# Altium PCB PCB4.PcbDoc
Units mm, origin at the board's own origin, x right, y up, seen from the top; angles counter-clockwise.
Board outline 120 x 55 mm, 4 copper layers (Top Layer, Layer 1, Layer 2, Bottom Layer), stack 0.603 mm thick; 49 components, 37 nets, 214 pads, 45 vias.
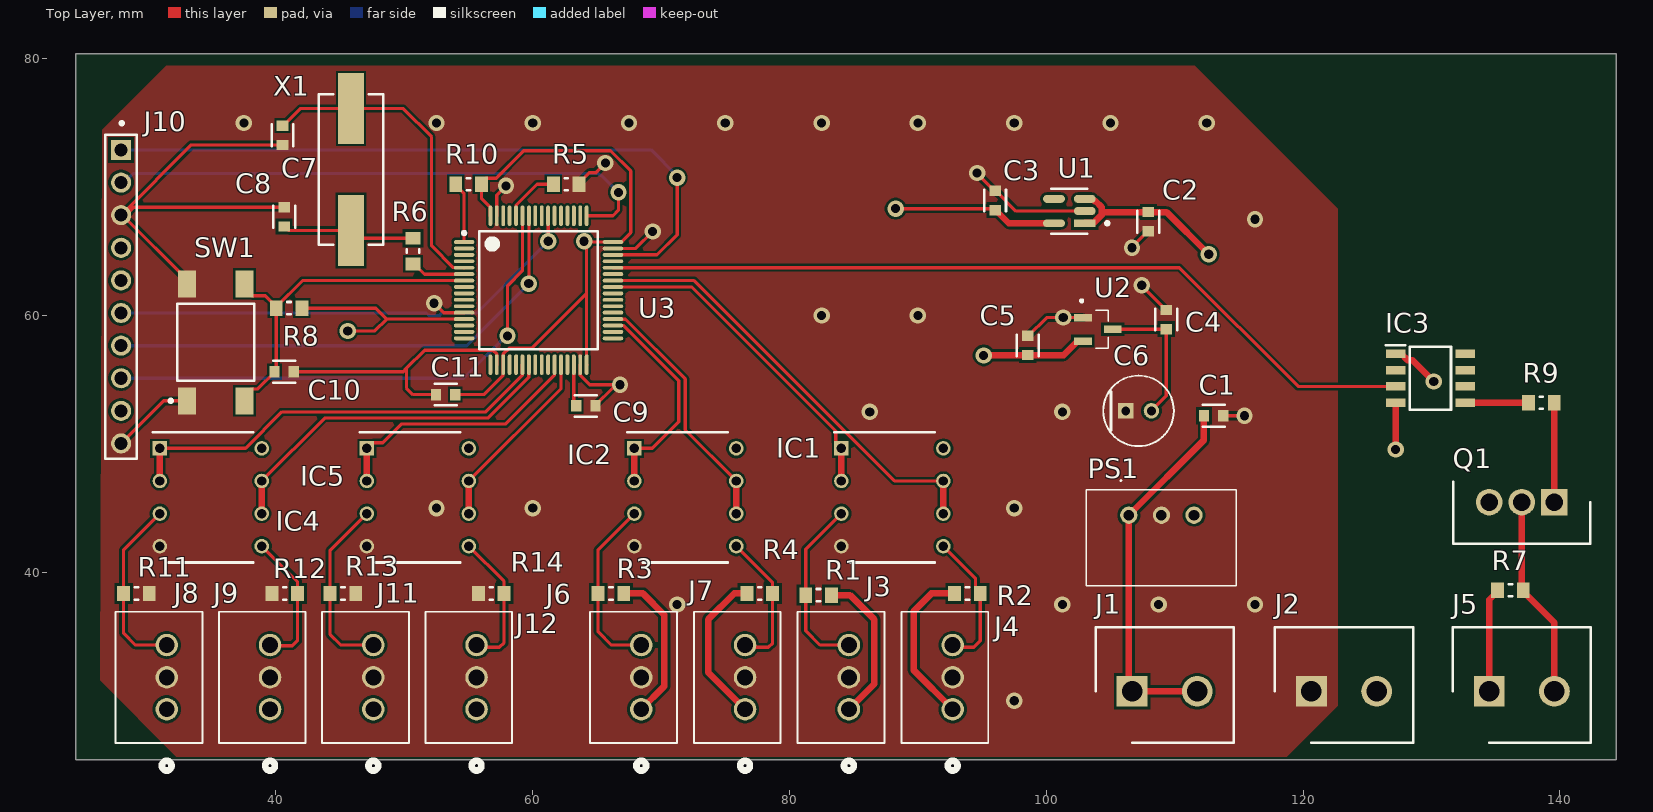
[diagram p0: Top Layer view]
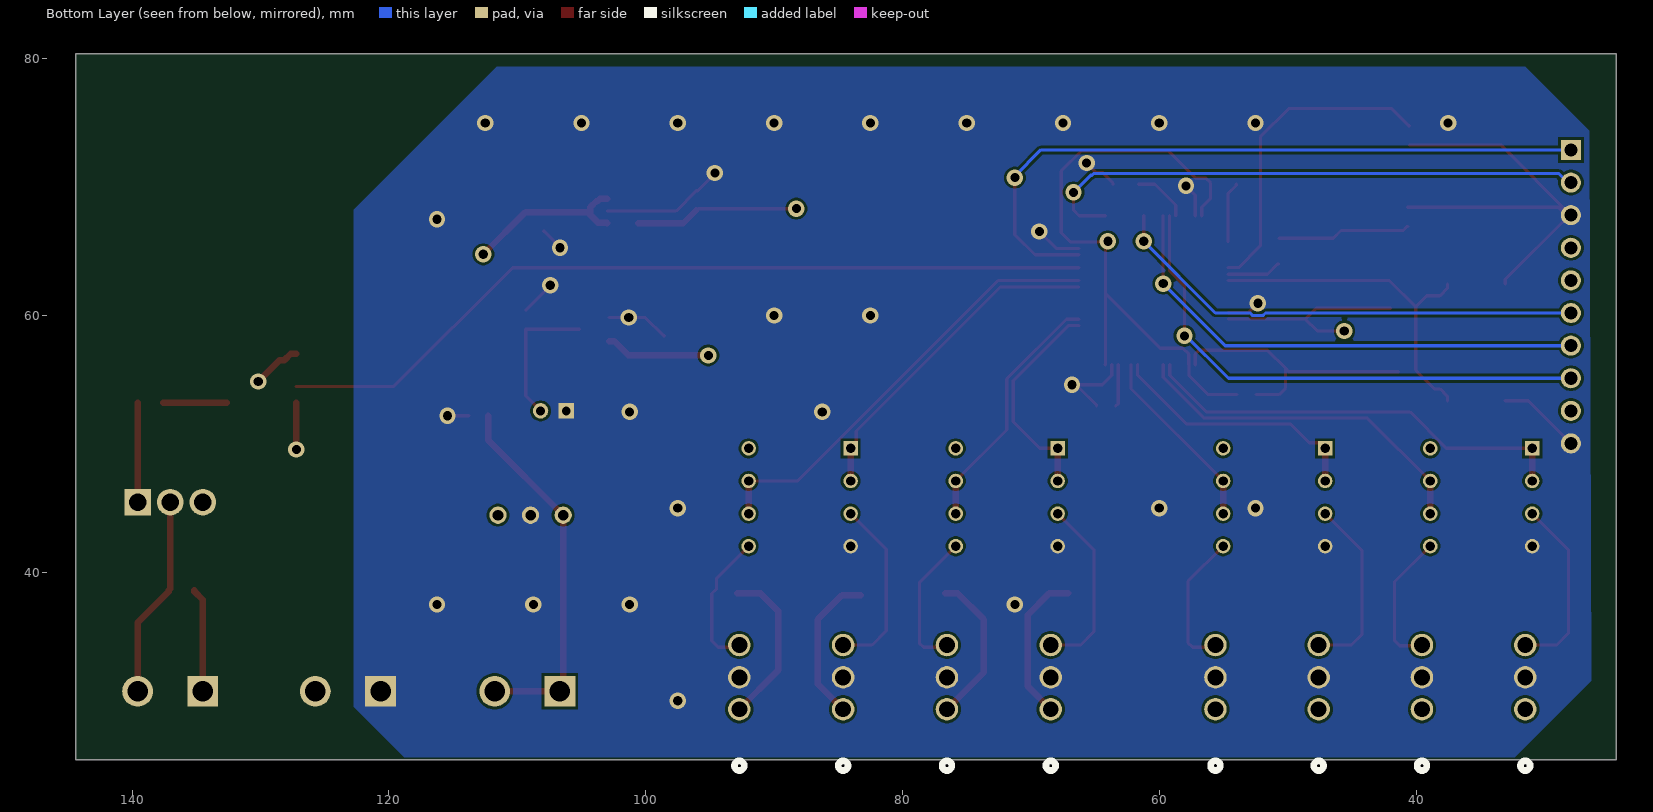
[diagram p1: Bottom Layer view, seen from below]
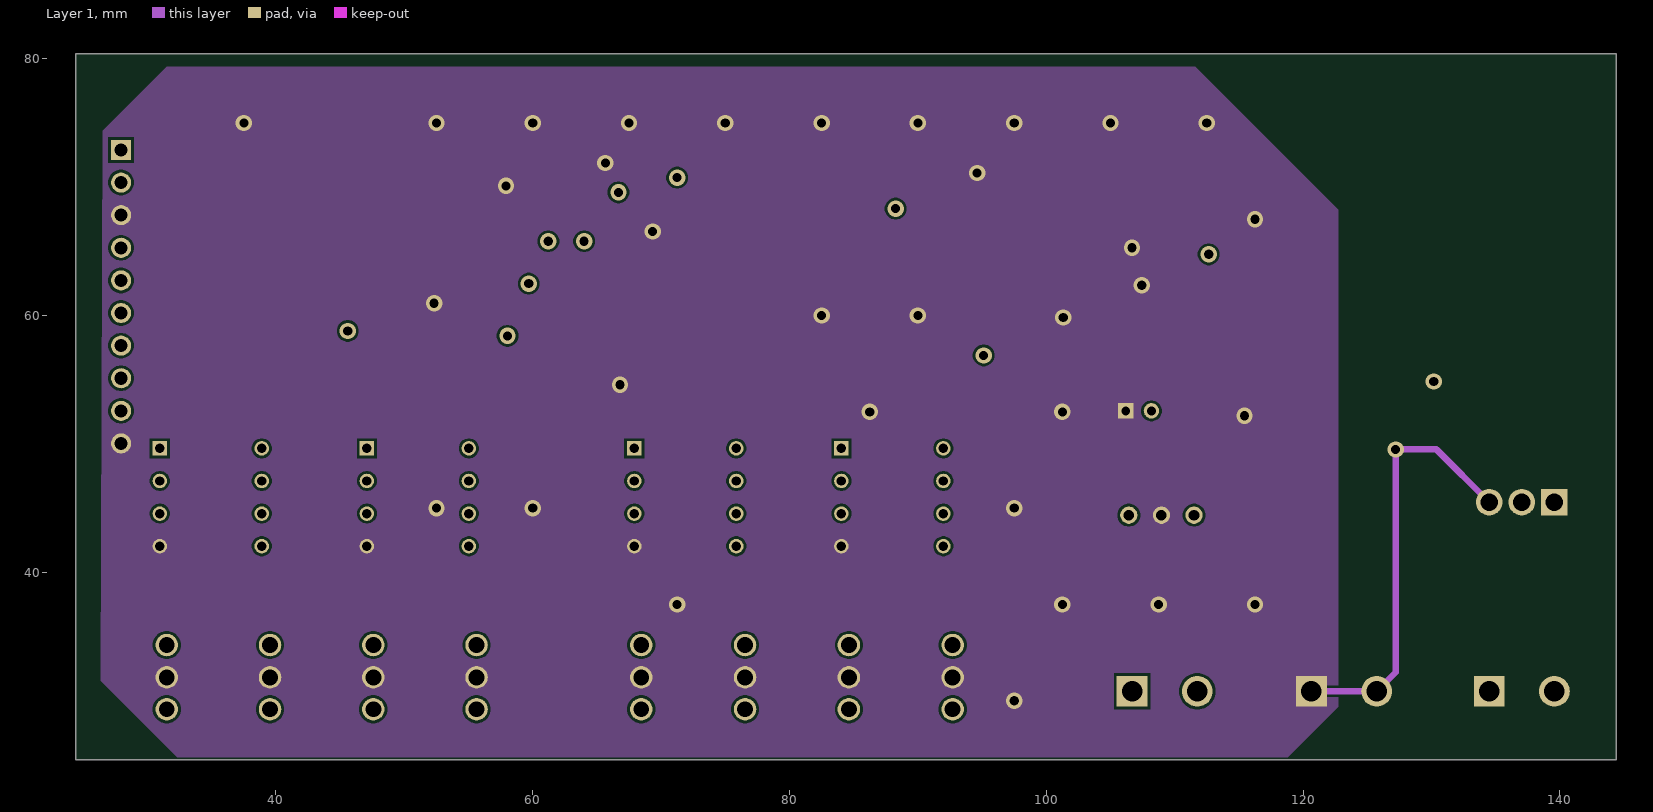
[diagram p2: Layer 1]
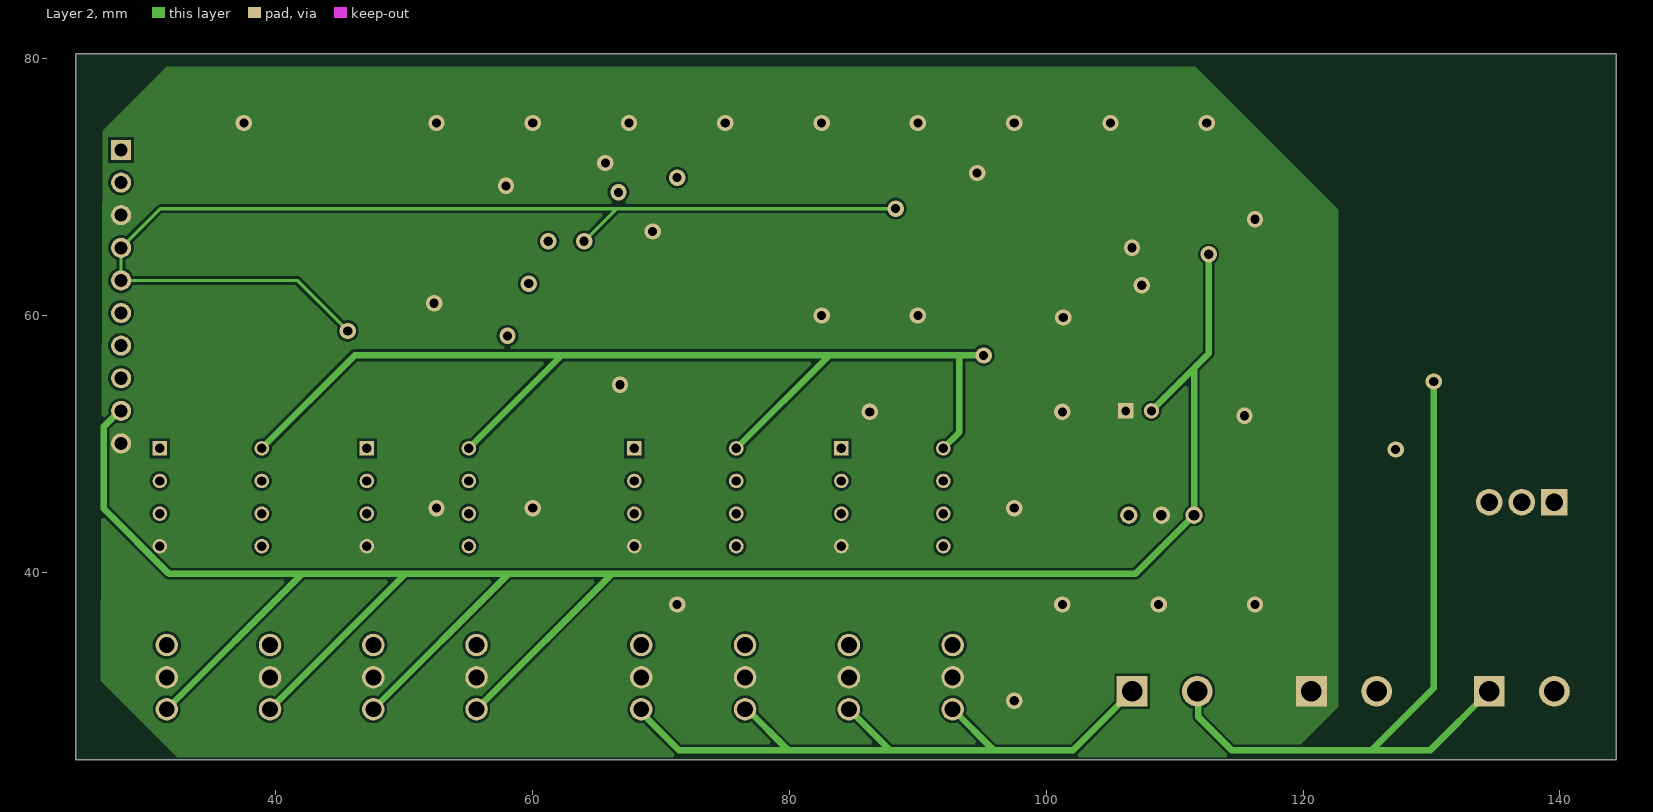
[diagram p3: Layer 2]
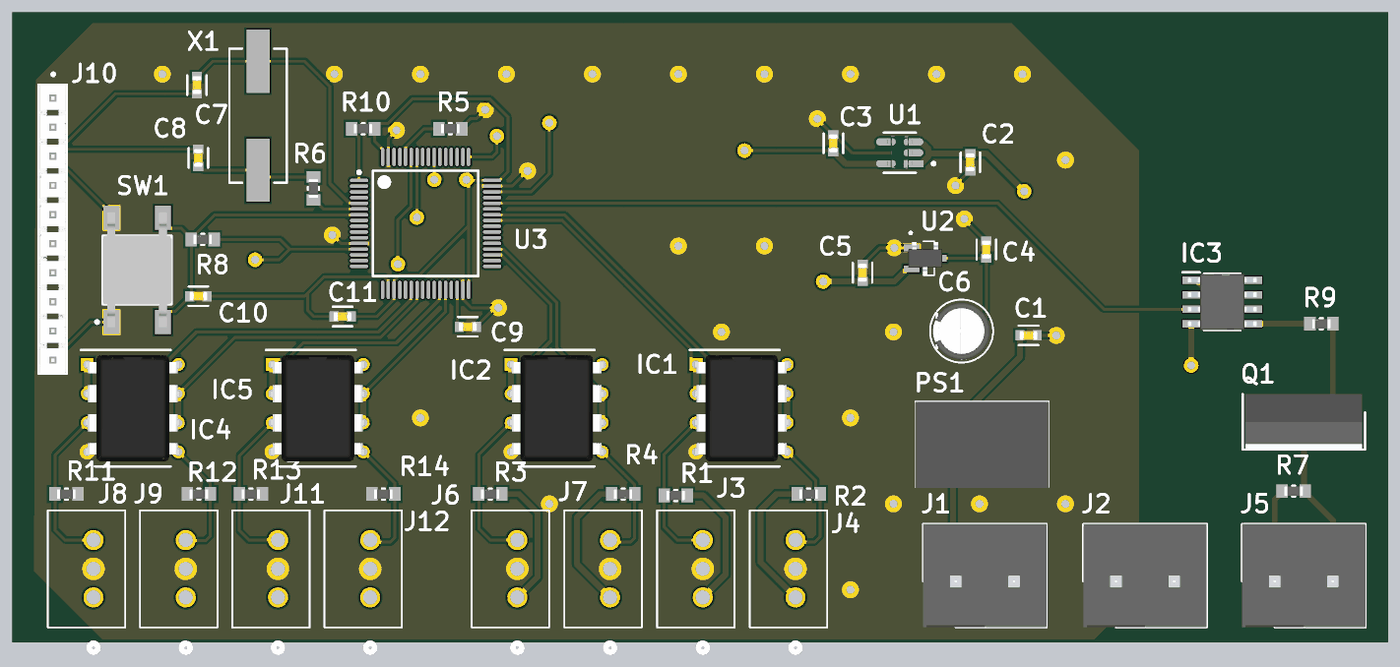
[diagram p4: 3D render of the assembled board from above, using the file's embedded part models]

## Layer stack, top to bottom
Top Solder: solder mask 0.0102, Solder Resist, Dk 3.5
Top Layer: signal copper 0.0356
Dielectric 2: prepreg 0.0711, PP-006, Dk 4.1
Layer 1: signal copper 0.035
Dielectric 1: dielectric 0.32, FR-4, Dk 4.8
Layer 2: signal copper 0.035
Dielectric 3: prepreg 0.0711, PP-006, Dk 4.1
Bottom Layer: signal copper 0.0356
Bottom Solder: solder mask 0.0102, Solder Resist, Dk 3.5

## Board outline
24.4,25.4 144.4,25.4 144.4,80.4 24.4,80.4

## Design rules (kind name [scope] priority, off if disabled: settings)
Clearance [All] p1: gap=0.2 ignorepadtopadclearanceinfootprint=FALSE
PolygonConnect [All] p1: connectstyle=Direct reliefconductorwidth=0.254 reliefentries=4 polygonreliefangle="90 Angle" airgapwidth=0.254
RoutingVias [All] p1: holewidth=0.711 width=1.27 viastyle="Through Hole" minholewidth=0.711 minwidth=1.27 maxholewidth=0.711 maxwidth=1.27
SolderMaskExpansion [All] p1: expansion=0.102 istentingtop=FALSE
SupplyNets "Schematic Supply Nets_1" [InNet('GND')] p1: voltage=0.000
SupplyNets "Schematic Supply Nets" [InNet('VCC')] p2: voltage=0.000
Width [All] p1: maxlimit=0.508 minlimit=0.254 preferedwidth=0.254
30 further rules are at their usual default settings.

## Components (designator, comment, footprint, x,y, rotation, side; value= is the part's Value field where it differs from the comment)
C1 "CC0603KRX7R9BB103" FP-CC0603-DA-MFG 113.03,52.197 r180 top value="3.3 uF"
C2 "CC0603KRX7R9BB103" FP-CC0603-DA-MFG 107.95,67.31 r90 top value="1 uF"
C3 "CC0603KRX7R9BB103" FP-CC0603-DA-MFG 96.012,68.961 r270 top value="1 uF"
C4 "CC0603KRX7R9BB103" FP-CC0603-DA-MFG 109.347,59.69 r270 top value="1 uF"
C5 "CC0603KRX7R9BB103" FP-CC0603-DA-MFG 98.552,57.67 r270 top value="1 uF"
C6 "100uF" FP-RAD-TH-D_5_0_5-L_11_1-MFG 107.188,52.578 r0 top
C7 "CC0603KRX7R9BB103" FP-CC0603-DA-MFG 40.513,74.041 r270 top value="20 pF"
C8 "CC0603KRX7R9BB103" FP-CC0603-DA-MFG 40.64,67.691 r90 top value="20 pF"
C9 "CC0603KRX7R9BB103" FP-CC0603-DA-MFG 64.135,52.959 r0 top value="2.2 uF"
C10 "CC0603KRX7R9BB104" FP-CC0603-DA-MFG 40.64,55.626 r0 top value="100 nF"
C11 "CC0603KRX7R9BB104" FP-CC0603-DA-MFG 53.213,53.848 r180 top value="100 nF"
IC1 "LM2904P" DIP794W53P254L959H508Q8N 88.011,45.847 r0 top
IC2 "LM2904P" DIP794W53P254L959H508Q8N 71.882,45.847 r0 top
IC3 "IR2101S" SOIC127P600X175-8N 129.921,55.118 r0 top
IC4 "LM2904P" DIP794W53P254L959H508Q8N 34.925,45.847 r0 top
IC5 "LM2904P" DIP794W53P254L959H508Q8N 51.054,45.847 r0 top
J1 "32.052" SHDR2W100P0X508_1X2_1076X900X1350P 106.68,30.734 r0 top
J2 "32.052" SHDR2W100P0X508_1X2_1076X900X1350P 120.65,30.734 r0 top
J3 "353120360" CONN_35312-0360_MOL 84.624,29.337 r90 top
J4 "353120360" CONN_35312-0360_MOL 92.71,29.337 r90 top
J5 "32.052" SHDR2W100P0X508_1X2_1076X900X1350P 134.493,30.734 r0 top
J6 "353120360" CONN_35312-0360_MOL 68.453,29.337 r90 top
J7 "353120360" CONN_35312-0360_MOL 76.539,29.337 r90 top
J8 "353120360" CONN_35312-0360_MOL 31.496,29.337 r90 top
J9 "353120360" CONN_35312-0360_MOL 39.539,29.337 r90 top
J10 "4-644456-0" FP-4-644456-0-MFG 27.94,61.468 r90 top
J11 "353120360" CONN_35312-0360_MOL 47.583,29.337 r90 top
J12 "353120360" CONN_35312-0360_MOL 55.626,29.337 r90 top
PS1 "SRH05S05" SRH05S05 108.966,43.075 r0 top
Q1 "IRFZ44n" TO254P483X1016X2223-3P 139.573,45.466 r180 top
R1 "CR0603-FX-1002EAS" FP-CR0603-AS-MFG 82.26,38.227 r0 top
R2 "CR0603-FX-1002EAS" FP-CR0603-AS-MFG 93.855,38.354 r180 top
R3 "CR0603-FX-1002EAS" FP-CR0603-AS-MFG 66.089,38.354 r0 top
R4 "CR0603-FX-1002EAS" FP-CR0603-AS-MFG 77.683,38.354 r180 top
R5 "CR0603-FX-1002EAS" FP-CR0603-AS-MFG 62.611,70.231 r180 top
R6 "CR0603-FX-1002EAS" FP-CR0603-AS-MFG 50.673,65.024 r270 top
R7 "CR0603-FX-1002EAS" FP-CR0603-AS-MFG 136.144,38.608 r180 top
R8 "CR0603-FX-1002EAS" FP-CR0603-AS-MFG 41.021,60.579 r0 top
R9 "CR0603-FX-1002EAS" FP-CR0603-AS-MFG 138.557,53.213 r0 top
R10 "CR0603-FX-1002EAS" FP-CR0603-AS-MFG 55.007,70.231 r0 top
R11 "CR0603-FX-1002EAS" FP-CR0603-AS-MFG 29.132,38.354 r180 top
R12 "CR0603-FX-1002EAS" FP-CR0603-AS-MFG 40.684,38.354 r0 top
R13 "CR0603-FX-1002EAS" FP-CR0603-AS-MFG 45.219,38.354 r180 top
R14 "CR0603-FX-1002EAS" FP-CR0603-AS-MFG 56.771,38.354 r0 top
SW1 "FSM4JSMATR" TECO-FSM4JSMATR_V 35.306,57.912 r180 top
U1 "AP2112K-3.3TRG1" FP-SOT25-IPC_A 101.796,68.138 r180 top
U2 "AP2125N-4.2TRG1" SOT95P282X145-3N 104.013,58.928 r270 top
U3 "STM32F411RET6" STM-LQFP64_L 60.452,61.976 r0 top
X1 "FOXSDLF/160-20" FOX-FOXSDLF160-20_V 45.847,71.374 r90 top

## Footprints (in the part's own frame and the unit in brackets; to place one, negate y for a bottom-side part, rotate by r counter-clockwise, add the part's x,y. Pads: shape width x height; smd on the part's side, far side on the other; paste and mask are expansions set on the pad)
CONN_35312-0360_MOL [mil]
  round 69 hole 49: 1(0,0) 2(98,0) 3(197,0)
  silkscreen extent -188,-109 299,157
DIP794W53P254L959H508Q8N [mm]
  rect 1.13x1.13 hole 0.73: 1(-3.97,3.81)
  round 1.13 hole 0.73: 2(-3.97,1.27) 3(-3.97,-1.27) 4(-3.97,-3.81) 5(3.97,-3.81) 6(3.97,-1.27) 7(3.97,1.27) 8(3.97,3.81)
  silkscreen extent -4.53,-5.08 3.3,5.08, body extent -4.1,-4.64 4.1,4.64, height 4.21
FOX-FOXSDLF160-20_V [mm] "SMD, 2-Leads, Body 5x11.7mm, Height 4.5mm"
  rect 5.5x2 smd: 1(-4.75,0) 2(4.75,0)
  silkscreen extent -5.85,-2.5 5.85,2.5, body extent -5.85,-2.5 5.85,2.5, height 4.5
FP-4-644456-0-MFG [mil]
  rect 61.65x61.65 hole 40 paste-99999 mask+0: 1(450,0)
  round 61.65 hole 40 paste-99999 mask+0: 2(350,0) 3(250,0) 4(150,0) 5(50,0) 6(-50,0) 7(-150,0) 8(-250,0) 9(-350,0) 10(-450,0)
  silkscreen extent -497,-49 537,49, body extent -500,-52 500,52, height 10
FP-CC0603-DA-MFG [mm]
  rect 0.8x0.9 smd paste+0 mask+0: 1(-0.75,0) 2(0.75,0)
  silkscreen extent -0.85,-0.85 0.85,0.85, body extent -1.35,-0.75 1.35,0.75, height 0.25
FP-CR0603-AS-MFG [mm]
  rect 1x1.2 smd paste+0 mask+0: 1(-1,0) 2(1,0)
  silkscreen extent -0.13,-0.48 0.13,0.48, body extent -1.6,-0.7 1.6,0.7, height 0.25
FP-RAD-TH-D_5_0_5-L_11_1-MFG [mm]
  rect 1.2x1.2 hole 0.7 paste-2539.97 mask+0: 1(-1,0)
  round 1.2 hole 0.7 paste-2539.97 mask+0: 2(1,0)
  silkscreen extent -2.75,-2.75 2.75,2.75, body extent -2.85,-2.85 2.85,2.85, height 0.25
FP-SOT25-IPC_A [mm]
  rect 1.707x0.616 smd paste+0 mask+0: 1(-1.201,0.95)
  rrect100% 1.707x0.616 smd paste+0 mask+0: 2(-1.201,0) 3(-1.201,-0.95) 4(1.201,-0.95) 5(1.201,0.95)
  silkscreen extent -3.08,-1.75 1.4,1.75, body extent -2.55,-2 2.55,2, height 0.25
SHDR2W100P0X508_1X2_1076X900X1350P [mm]
  rect 2.4x2.4 hole 1.6: 1(0,0)
  round 2.4 hole 1.6: 2(5.08,0)
  silkscreen extent -2.84,-4 7.92,5, body extent -2.84,-4 7.92,5, height 13.5
SOIC127P600X175-8N [mm]
  rect 1.525x0.65 smd: 1(-2.712,1.905) 2(-2.712,0.635) 3(-2.712,-0.635) 4(-2.712,-1.905) 5(2.712,-1.905) 6(2.712,-0.635) 7(2.712,0.635) 8(2.712,1.905)
  silkscreen extent -3.47,-2.45 1.6,2.58, body extent -3,-2.45 3,2.45, height 1.75
SOT95P282X145-3N [mm]
  rect 0.59x1.39 smd: 1(-0.915,-1.165) 2(0.915,-1.165) 3(0,1.165)
  silkscreen extent -2.31,-1.36 1.48,0.8, body extent -1.41,-1.48 1.41,1.48, height 1.45
SRH05S05 [mm]
  round 1.349 hole 0.83: 1(-2.54,1.375) 2(0,1.375) 3(2.54,1.375)
  silkscreen extent -5.84,-4.13 5.84,4.12, body extent -5.84,-4.2 5.84,3.3, height 10.16
STM-LQFP64_L [mm] "QFP, 64-Leads, Body 10x10mm, Pitch 0.5mm, IPC High Density"
  oval 1.6x0.3 smd: 1(-5.8,3.75) 2(-5.8,3.25) 3(-5.8,2.75) 4(-5.8,2.25) 5(-5.8,1.75) 6(-5.8,1.25) 7(-5.8,0.75) 8(-5.8,0.25) 9(-5.8,-0.25) 10(-5.8,-0.75) 11(-5.8,-1.25) 12(-5.8,-1.75) 13(-5.8,-2.25) 14(-5.8,-2.75) 15(-5.8,-3.25) 16(-5.8,-3.75) 33(5.8,-3.75) 34(5.8,-3.25) 35(5.8,-2.75) 36(5.8,-2.25) 37(5.8,-1.75) 38(5.8,-1.25) 39(5.8,-0.75) 40(5.8,-0.25) 41(5.8,0.25) 42(5.8,0.75) 43(5.8,1.25) 44(5.8,1.75) 45(5.8,2.25) 46(5.8,2.75) 47(5.8,3.25) 48(5.8,3.75)
  oval 0.3x1.6 smd: 17(-3.75,-5.8) 18(-3.25,-5.8) 19(-2.75,-5.8) 20(-2.25,-5.8) 21(-1.75,-5.8) 22(-1.25,-5.8) 23(-0.75,-5.8) 24(-0.25,-5.8) 25(0.25,-5.8) 26(0.75,-5.8) 27(1.25,-5.8) 28(1.75,-5.8) 29(2.25,-5.8) 30(2.75,-5.8) 31(3.25,-5.8) 32(3.75,-5.8) 49(3.75,5.8) 50(3.25,5.8) 51(2.75,5.8) 52(2.25,5.8) 53(1.75,5.8) 54(1.25,5.8) 55(0.75,5.8) 56(0.25,5.8) 57(-0.25,5.8) 58(-0.75,5.8) 59(-1.25,5.8) 60(-1.75,5.8) 61(-2.25,5.8) 62(-2.75,5.8) 63(-3.25,5.8) 64(-3.75,5.8)
  silkscreen extent -5.92,-4.6 4.6,4.6, body extent -5,-5 5,5, height 1.6
TECO-FSM4JSMATR_V [mm] "SMD, 4-Leads, Body 6x6mm, Pitch 4.5mm"
  rect 1.4x2.1 smd: 1(2.25,4.55) 2(2.25,-4.55) 3(-2.25,4.55) 4(-2.25,-4.55)
  silkscreen extent -3,-3 3.62,4.67, body extent -3,-5 3,5, height 5.08
TO254P483X1016X2223-3P [mm]
  rect 2.07x2.07 hole 1.38: 1(0,0)
  round 2.07 hole 1.38: 2(2.54,0) 3(5.08,0)
  silkscreen extent -2.8,-1.61 7.88,3.22, body extent -2.54,-1.61 7.62,3.22, height 22.23

## Part data
C1 C2 C3 C4 C5 C7 C8 C9: library part CMP-2100-03600-2, "CAP CER 10000PF 50V X7R 0603", Capacitance="10 nF", Manufacturer=YAGEO, Package=CC0603-DA, Temperature="-55°C to +125°C", Temperature Characteristic=X7R, Temperature Coefficient=15%, Temperature Range High=+125°C, Temperature Range Low=-55°C, Tolerance=0.1, Voltage="50 V", Automotive=No, Category=Cap, ComponentLink2Description=Datasheet, ComponentLink2URL=http://www.yageo.com/documents/recent/UPY-GPHC_X7R_6.3V-to-50V_18.pdf, Device Class L1="Passive Components", Device Class L2=Capacitors, Device Class L3="Ceramic Capacitors", Digikey Description="CAP CER 10000PF 50V X7R 0603", Footprint Url=http://www.yageo.com/exep/pages/download/literatures/UPY-C_GEN_24.pdf, Height=0.9mm, Lead Free=Yes, Manufacturer Part Number=CC0603KRX7R9BB103, Material=Ceramic, Mouser Description="Multilayer Ceramic Capacitor, CC Series, 0.01 - F, - 10%, X7R, 50 V, 0603 [1608 Metric]", Octopart=https://octopart.com/cc0603krx7r9bb103-yageo-192938, RoHS=TRUE, Voltage Rating="50 V"
C6: library part CMP-05427-001055-1, "Aluminum Electrolytic Capacitors (Radial Lead Type) 33uF ±20% 35V"
C10 C11: library part CMP-2100-03601-2, "CAP CER 0.1UF 50V X7R 0603", Capacitance="100 nF", Manufacturer=YAGEO, Package=CC0603-DA, Temperature="-55°C to +125°C", Temperature Characteristic=X7R, Temperature Coefficient=15%, Temperature Range High=+125°C, Temperature Range Low=-55°C, Tolerance=0.1, Voltage="50 V", Automotive=No, Category=Cap, ComponentLink2Description=Datasheet, ComponentLink2URL=http://www.yageo.com/documents/recent/UPY-GPHC_X7R_6.3V-to-50V_18.pdf, Device Class L1="Passive Components", Device Class L2=Capacitors, Device Class L3="Ceramic Capacitors", Digikey Description="CAP CER 0.1UF 50V X7R 0603", Footprint Url=http://www.yageo.com/exep/pages/download/literatures/UPY-C_GEN_24.pdf, Height=0.9mm, Lead Free=Yes, Manufacturer Part Number=CC0603KRX7R9BB104, Material=Ceramic, Mouser Description="Multilayer Ceramic Capacitor, CC Series, 0.1 - F, - 10%, X7R, 50 V, 0603 [1608 Metric]", Octopart=https://octopart.com/cc0603krx7r9bb104-yageo-42244635, RoHS=TRUE, Voltage Rating="50 V"
IC1 IC2 IC4 IC5: "Integrated Circuit", Manufacturer_Name="Texas Instruments", Mouser Part Number=595-LM2904P, Arrow Part Number=LM2904P, Arrow Price/Stock=https://www.arrow.com/en/products/lm2904p/texas-instruments?utm_currency=USD&region=europe, Datasheet Link=http://www.ti.com/lit/ds/symlink/lm2904.pdf, Height=5.08mm, Manufacturer_Part_Number=LM2904P, Mouser Price/Stock=https://www.mouser.co.uk/ProductDetail/Texas-Instruments/LM2904P?qs=3pnr37ZAbK%252BRjjWgaCXbYA%3D%3D
IC3: "Integrated Circuit", Manufacturer_Name=Infineon, Datasheet Link=https://pdf1.alldatasheet.com/datasheet-pdf/view/102221/IRF/IR2101S.html, Height=1.75mm, Manufacturer_Part_Number=IR2101S
J1 J2 J5: "Connector", Manufacturer_Name=Altech, Mouser Part Number=845-32.052, Datasheet Link=https://www.mouser.com/datasheet/2/16/PCBUS-32235.pdf, Height=13.5mm, Manufacturer_Part_Number=32.052, Mouser Price/Stock=https://www.mouser.co.uk/ProductDetail/Altech/32.052?qs=3W%2FV3E1N0K7DFKJl2BNhnQ%3D%3D
J3 J4 J6 J7 J8 J9 J11 J12: Package=None, Availability=Unavailable, MP=353120360, Price=None
J10: library part CMP-03369-000038-1, "CONN HEADER VERT 10POS 2.54MM", Current Rating=5A, Manufacturer="TE Connectivity", Temperature="-55°C to +105°C", Temperature Range High=+105°C, Temperature Range Low=-55°C, Voltage Rating=250V, Automotive=No, Category=Conn, ComponentLink2Description=Datasheet, ComponentLink2URL=https://www.te.com/commerce/DocumentDelivery/DDEController?Action=showdoc&DocId=Data+Sheet%7F82056_MTA%7F0818%7Fpdf%7FEnglish%7FENG_DS_82056_MTA_0818.pdf%7F4-644456-0, Conn Gender=Male, Conn Orientation=Vertical, Contact Material=Tin, Device Class L1=Connectors, Device Class L2="Headers and Wire Housings", Device Class L3=unset, Digikey Description="CONN HEADER VERT 10POS 2.54MM", Footprint Url=https://www.te.com/commerce/DocumentDelivery/DDEController?Action=showdoc&DocId=Customer+Drawing%7F644456%7FD2%7Fpdf%7FEnglish%7FENG_CD_644456_D2.pdf%7F4-644456-0, Height=0.408inch, Lead Free=Yes, Manufacturer Part Number=4-644456-0, Mouser Description="Headers & Wire Housings NARROW FLT HDR 10P Straight Post", Number of Contacts=10, Number of Rows=1, Octopart=https://octopart.com/4-644456-0-te+connectivity-39514173, Package=4-644456-0, Pitch=2.54mm, RoHS=TRUE
PS1: "Power Supply", Manufacturer_Name="XP POWER", Mouser Part Number=209-SRH05S05, Datasheet Link=https://componentsearchengine.com/Datasheets/2/SRH05S05.pdf, Height=10.66mm, Manufacturer_Part_Number=SRH05S05, Mouser Price/Stock=https://www.mouser.co.uk/ProductDetail/XP-Power/SRH05S05?qs=w%2Fv1CP2dgqqpXLkAz6oqFg%3D%3D
Q1: "Transistor", Manufacturer_Name=Infineon, Mouser Part Number=N/A, Datasheet Link=http://www.irf.com/product-info/datasheets/data/irfz44n.pdf, Height=4.83mm, Manufacturer_Part_Number=IRFZ44n, Mouser Price/Stock=https://www.mouser.co.uk/ProductDetail/Infineon-IR/IRFZ44N?qs=GUK3I%2FECFMgXeaoKiF3JzA%3D%3D
R1 R2 R3 R4 R5 R7 R8 R10 R11 R12 R13 R14: library part CMP-07231-000018-1, "RES 10K OHM 1% 1/10W 0603", Case Code (Imperial)=0603, Case Code (Metric)=1608, Max Operating Temperature=155°C, Max Power Dissipation=10mW, Min Operating Temperature=-55°C, Resistance=10kR, Temperature Coefficient=100ppm/°C, Tolerance=1%, Case/Package=0603, Composition="Thick Film", Features=Anti-Sulfur, Number of Terminations=2, Packaging="Cut Tape"
R6: library part CMP-07231-000018-1, "RES 10K OHM 1% 1/10W 0603", Case Code (Imperial)=0603, Case Code (Metric)=1608, Max Operating Temperature=155°C, Max Power Dissipation=10mW, Min Operating Temperature=-55°C, Resistance="0 R", Temperature Coefficient=100ppm/°C, Tolerance=1%, Case/Package=0603, Composition="Thick Film", Features=Anti-Sulfur, Number of Terminations=2, Packaging="Cut Tape"
R9: library part CMP-07231-000018-1, "RES 10K OHM 1% 1/10W 0603", Case Code (Imperial)=0603, Case Code (Metric)=1608, Max Operating Temperature=155°C, Max Power Dissipation=10mW, Min Operating Temperature=-55°C, Resistance=10R, Temperature Coefficient=100ppm/°C, Tolerance=1%, Case/Package=0603, Composition="Thick Film", Features=Anti-Sulfur, Number of Terminations=2, Packaging="Cut Tape"
SW1: library part CMP-2000-07486-1, "Micro Miniature Push Button Switch FSM JSM, 50 mA, -35 to 85 degC, 4-Pin SMD, RoHS, Tape and Reel", Capacitance=0f, Case\/Package=SMD/SMT, Contact Current Rating=50mA, Contact Resistance=100mOhm, Manufacturer="TE Connectivity", Max Operating Temperature=85degC, Max Voltage Rating (DC)=12V, Min Operating Temperature=-35degC, Operating Force=160gf, Package Description="4-Pin Surface Mount Device, Body 6 x 6 mm, Pitch 4.5 mm", Package Quantity=1200, Voltage Rating (DC)=24V, Actuator Length=0.055inch, Actuator Material=Polyamide, Contact Material=CopperAlloy, Contact Plating=Silver, Current Rating=50mA, Datasheet URL=http://www.te.com/commerce/DocumentDelivery/DDEController?Action=showdoc&DocId=Customer+Drawing%7F2-1437565-7%7FV%7Fpdf%7FEnglish%7FENG_CD_2-1437565-7_V.pdf%7F4-1437565-2, Datasheet Version="Rev. V, 02/2015", Electrical Life=100000Cycles, Illumination Type=Illuminated, Manufacturer URL=http://www.te.com/, Mechanical Life=100000Cycles, Mount=SurfaceMount, Mounting Technology=SurfaceMount, Orientation=Straight, Package Reference=FSM4JSMATR, Packaging=TapeandReel, REACH SVHC=Unknown, RoHSCompliant=true, Switch Travel=0.25mm, Termination=GullWing, Throw Configuration=SPST
U1: library part CMP-12756-000035-1, "IC REG LINEAR 3.3V 600MA SOT25", Case/Package=SOT-23-5, Dropout Voltage=250mV, Max Input Voltage=6V, Max Operating Temperature=85°C, Max Output Current=600mA, Min Input Voltage=2.5V, Min Operating Temperature=-40°C, Output Voltage=3.3V, Package Quantity=1, Quiescent Current=55uA, Accuracy=1.5%, Height=1.3mm, Lead Free="Lead Free", Length=3.1mm, Mount="Surface Mount", Number of Outputs=1, Number of Pins=5, Number of Regulators=1, Output Current=600mA, Output Type=Fixed, Packaging="Tape and Reel", Polarity=Positive, Width=1.7mm
U2: "Linear Voltage Regulator IC Positive Fixed 1 Output 300mA SOT-23-3", Package="SOT-23-3 Diodes Inc.", Availability="In Stock", Check_prices=https://www.snapeda.com/parts/AP2125N-4.2TRG1/Diodes+Inc./view-part/?ref=eda, MF="Diodes Inc.", MP=AP2125N-4.2TRG1, Price=None, Purchase-URL=https://pricing.snapeda.com/search/part/AP2125N-4.2TRG1/?ref=eda, SnapEDA_Link=https://www.snapeda.com/parts/AP2125N-4.2TRG1/Diodes+Inc./view-part/?ref=snap
U3: library part CMP-0243-00169-1, "ARM Cortex-M4 32-bit MCU+FPU, 512 KB Flash, 128 KB RAM, 50 I/Os, 64-Pin LQFP, -40 to 85 degC, Tray", I/Os (High Current)=50, Operating Frequency(F) (Processor speed) (MHz)=100, Package Description=LQFP64, Package Reference="64-Pin Low-profile Quad Flat Package, Body 10 x 10 mm, Pitch 0.5 mm", Supply Voltage(Vcc) min (V)=1.7, ComponentLink1Description="Manufacturer URL", ComponentLink1URL=http://www.st.com/, ComponentLink2Description=Datasheet, ComponentLink2URL=http://www.st.com/st-web-ui/static/active/en/resource/technical/document/datasheet/DM00115249.pdf, Core="ARM Cortex-M4", DatasheetVersion="Rev. 6", FLASH Size (Prog) (kB)=512, Internal RAM Size (kB)=128, Mounting Technology="Surface Mount", Packing=Tray
X1: library part CMP-1749-00001-1, "Resistance Weld SMD Crystal, 16 MHz, +/- 30 ppm, 20 pF, -20 to 70 degC, 2-Pin SMD, RoHS, Tape and Reel", Case\Package=SOT-553-6, Max Operating Temperature="150 degC", Max Supply Voltage="3.3 V", Max Supply Voltage (DC)="6 V", Min Operating Temperature="-55 degC", Min Supply Voltage="1.4 V", Min Supply Voltage (DC)="4 V", Output Current="3 mA", Package Quantity=1, ComponentLink1Description="Manufacturer URL", ComponentLink1URL=http://www.foxonline.com/, ComponentLink2Description=Datasheet, ComponentLink2URL=http://foxonline.com/pdfs/hc49sdlf.pdf, DatasheetVersion=Mar-15, Height="0.55 mm", Interface=I2C, Length="1.6 mm", Mount="Surface Mount", PackageDescription="2-Pin Surface Mount Device, Body 5 x 11.7 mm, Height 4.5 mm", PackageReference=FOX-FOXSDLF160-20, Packaging="Cut Tape", Pins=6, Radiation Hardening=No, REACH SVHC="No SVHC", RoHSCompliant=true, Weight="9.9E-05 oz", Width="1.2 mm"

## Via types
v1: diameter 1.27, hole 0.711, Top Layer to Bottom Layer, 45 vias

## Nets (pads, with @x,y where several pads share a name; then routed paths per layer and width w, separated by ;. In a path a pad name is that pad's centre, name@x,y a point inside that pad or via, vN(x,y) a via of type N, cw(c..) or ccw(c..) an arc to the next point about the centre after c; other vN are vias at no path point)
GND: C1.1 C2.1 C3.1 C4.1 C5.1 C6.1 C7.2 C8.2 C9.2 C10.2 C11.2 IC1.4 IC2.4 IC3.4 IC4.4 IC5.4 J2.1 J2.2 J3.2 J4.2 J6.2 J7.2 J8.2 J9.2 J10.3 J10.10 J11.2 J12.2 PS1.2 Q1.3 R5.1 R11.1 R12.1 R13.1 R14.1 SW1.1 SW1.2 U1.2 U2.1 U3.12 U3.18 U3.31 U3.47 U3.63 | length 139.7
  Top Layer w0.254: J10.10 31.264,53.362 SW1.1 ; SW1.2 33.056,62.812 28.05,67.818 J10.3 ; C7.2 33.413,73.291 J10.3 ; C8.2 28.918,68.441 28.295,67.818 J10.3 ; C10.2 49.911,55.626 50.165,55.88 ; v1(52.324,60.96) 53.058,60.226 U3.12 ; C11.2 50.673,53.848 50.165,54.356 50.165,55.88 ; U3.18 57.193,56.185 57.193,57.009 56.9,57.303 51.588,57.303 50.165,55.88 ; U3.63 57.202,69.377 57.912,70.087 v1(57.912,70.104) ; R5.1 63.611,70.331 64.407,71.127 64.904,71.127 v1(65.659,71.882) ; U3.31 63.711,56.167 63.711,55.343 64.443,54.61 v1(66.802,54.61) 66.608,54.416 66.292,54.416 64.885,53.009 C9.2 ; U3.47 68.02,65.226 v1(69.342,66.548) ; v1(94.615,71.108) 94.615,71.058 95.962,69.711 C3.1 ; C3.1@96.062,69.711 97.635,68.138 U1.2 ; C5.1 98.602,58.42 100.025,59.843 v1(101.32,59.843) U2.1 ; v1(106.668,65.278) 106.668,65.328 107.9,66.56 C2.1 ; v1(107.43,62.357) 107.43,62.307 109.297,60.44 C4.1 ; C1.1 v1(115.443,52.197)
  Top Layer w0.508: v1(127.209,49.575) IC3.4
  Layer 1 w0.508: J2.1 J2.2 127.209,32.213 v1(127.209,49.575) 130.384,49.575 Q1.3
  other v1: 97.5,30 71.25,37.5 101.25,37.5 108.75,37.5 116.25,37.5 52.5,45 60,45 97.5,45 86.25,52.5 101.25,52.5 82.5,60 90,60 116.25,67.5 37.5,75 52.5,75 60,75 67.5,75 75,75 82.5,75 90,75 97.5,75 105,75 112.5,75
NetC1_2: C1.2 IC3.1 J1.1 J1.2 J3.1 J4.1 J5.1 J6.1 J7.1 PS1.1 R1.2 R2.2 R3.2 R4.2 R7.2 | length 203.3
  Top Layer w0.508: R3.2 68.58,38.354 70.231,36.703 70.231,31.115 J6.1 ; J7.1 73.66,32.216 73.66,36.322 75.692,38.354 R4.2 ; R1.2 84.709,38.227 86.614,36.322 86.614,31.327 J3.1 ; J4.1 89.662,32.385 89.662,36.957 91.059,38.354 R2.2 ; J1.2 J1.1 106.426,30.988 PS1.1 112.28,50.304 C1.2 ; IC3.1 127.646,57.023 128.137,56.532 128.507,56.532 v1(130.175,54.864) ; J5.1 134.493,37.857 135.144,38.508 R7.2
  Layer 2 w0.508: J6.1 68.453,29.083 71.374,26.162 79.883,26.162 ; J7.1 76.708,29.337 79.883,26.162 ; J3.1 87.799,26.162 ; J4.1 95.885,26.162 96.012,26.162 ; J1.1 102.108,26.162 96.012,26.162 ; J1.2 111.817,30.677 111.817,28.772 114.427,26.162 125.349,26.162 ; v1(130.175,54.864) 130.175,30.988 125.349,26.162 ; J5.1 129.921,26.162 125.349,26.162 ; 79.883,26.162 87.799,26.162 ; 87.799,26.162 96.012,26.162
NetC2_2: C2.2 C4.2 C6.2 J8.1 J9.1 J10.9 J11.1 J12.1 PS1.3 U1.1 U1.3 U2.3 | length 206.9
  Top Layer w0.254: U2.3 109.335,58.928 C4.2 109.347,53.737 C6.2
  Top Layer w0.508: U1.1 103.051,67.242 103.724,67.242 104.305,67.822 104.305,68.138 ; U1.3 103.572,69.088 103.76,68.9 103.858,68.9 104.305,68.454 104.305,68.138 ; v1(112.649,64.77) 109.359,68.06 C2.2 104.383,68.06 104.305,68.138
  Layer 2 w0.508: J10.9 27.813,52.578 26.6,51.365 26.6,44.951 31.673,39.878 42.037,39.878 ; J8.1 42.037,39.878 ; J9.1 50.08,39.878 50.165,39.878 ; J11.1 58.124,39.878 ; J12.1 66.167,39.878 ; C6.2 111.506,55.896 ; v1(112.649,64.77) 112.649,57.039 111.506,55.896 ; 42.037,39.878 50.165,39.878 ; 50.165,39.878 58.124,39.878 ; 58.124,39.878 66.167,39.878 ; 66.167,39.878 106.934,39.878 PS1.3 111.506,55.896
NetC5_2: C5.2 IC1.8 IC2.8 IC4.8 IC5.8 U2.2 | length 95.7
  Top Layer w0.508: v1(95.123,56.896) 95.135,56.908 98.54,56.908 C5.2 101.355,56.92 102.448,58.013 U2.2
  Layer 2 w0.508: IC4.8 46.134,56.896 62.23,56.896 ; IC5.8 62.23,56.863 62.23,56.896 ; IC2.8 83.091,56.896 83.185,56.896 ; IC1.8 93.218,50.894 93.218,56.896 ; v1(95.123,56.896) 93.218,56.896 ; 62.23,56.896 83.185,56.896 ; 83.185,56.896 93.218,56.896
NetC7_1: C7.1 U3.5 X1.2 | length 24.8
  Top Layer w0.254: C7.1 40.563,74.791 41.896,76.124 X1.2 49.909,76.124 52.119,73.914 52.119,65.435 53.819,63.735 54.643,63.735 U3.5
NetC8_1: C8.1 R6.1 X1.1 | length 10.4
  Top Layer w0.254: C8.1 40.69,66.941 41.007,66.624 X1.1 46.447,66.024 R6.1
NetC9_1: C9.1 U3.30 | length 3.3
  Top Layer w0.254: U3.30 63.202,53.142 C9.1
NetC10_1: C10.1 R8.1 SW1.3 SW1.4 U3.7 | length 27.5
  Top Layer w0.254: SW1.3 37.556,53.712 38.129,54.285 38.599,54.285 39.89,55.576 C10.1 40.021,55.757 R8.1 R8.1@40.021,60.679 ; SW1.4 37.556,62.112 38.129,61.539 39.161,61.539 R8.1@40.021,60.679 ; U3.7 42.068,62.726 R8.1@40.021,60.679
NetIC1_1: IC1.1 IC1.2 U3.41 | length 26.1
  Top Layer w0.254: U3.41 72.387,62.226 83.603,51.01 83.603,50.095 IC1.1
  Top Layer w0.508: IC1.2 IC1.1
NetIC1_3: IC1.3 J3.3 R1.1 | length 14.1
  Top Layer w0.254: IC1.3 81.26,41.796 R1.1 81.26,35.453 82.372,34.341 J3.3
NetIC1_5: IC1.5 J4.3 R2.1 | length 11
  Top Layer w0.254: IC1.5 94.482,39.536 94.482,38.727 R2.1 94.855,34.657 94.361,34.163 92.888,34.163 J4.3
NetIC1_6: IC1.6 IC1.7 U3.42 | length 34.7
  Top Layer w0.254: U3.42 72.564,62.726 88.173,47.117 IC1.7
  Top Layer w0.508: IC1.6 IC1.7
NetIC2_1: IC2.1 IC2.2 U3.35 | length 17
  Top Layer w0.254: U3.35 66.261,59.217 67.085,59.217 71.374,54.929 71.374,51.721 69.31,49.657 IC2.1
  Top Layer w0.508: IC2.2 IC2.1
NetIC2_3: IC2.3 J6.3 R3.1 | length 14.2
  Top Layer w0.254: IC2.3 65.089,41.754 R3.1 65.089,35.368 66.116,34.341 J6.3
NetIC2_5: IC2.5 J7.3 R4.1 | length 11.1
  Top Layer w0.254: IC2.5 78.683,39.206 R4.1 78.683,34.487 78.359,34.163 76.716,34.163 J7.3
NetIC2_6: IC2.6 IC2.7 U3.36 | length 19.7
  Top Layer w0.254: U3.36 66.261,59.717 67.227,59.717 71.882,55.063 71.882,51.087 IC2.7
  Top Layer w0.508: IC2.6 IC2.7
NetIC3_3: IC3.3 U3.44 | length 64.8
  Top Layer w0.254: U3.44 110.363,63.726 119.606,54.483 IC3.3
NetIC3_5: IC3.5 R9.1 | length 4.9
  Top Layer w0.508: IC3.5 R9.1
NetIC4_1: IC4.1 IC4.2 U3.22 | length 34
  Top Layer w0.254: IC4.1 37.634,49.657 40.469,52.493 56.343,52.493 59.193,55.343 U3.22@59.193,56.167
  Top Layer w0.508: IC4.2 IC4.1
NetIC4_3: IC4.3 J8.3 R11.2 | length 14.2
  Top Layer w0.254: IC4.3 28.132,41.754 R11.2 28.132,35.241 29.032,34.341 J8.3
NetIC4_5: IC4.5 J9.3 R12.2 | length 10.8
  Top Layer w0.254: IC4.5 41.684,39.248 R12.2 41.684,34.699 41.275,34.29 39.59,34.29 J9.3
NetIC4_6: IC4.6 IC4.7 U3.23 | length 27.7
  Top Layer w0.254: IC4.7 43.794,52.016 56.509,52.016 59.693,55.201 59.693,56.167 U3.23
  Top Layer w0.508: IC4.6 IC4.7
NetIC5_1: IC5.1 IC5.2 U3.27 | length 20.3
  Top Layer w0.254: IC5.1 47.522,50.095 48.317,50.095 49.784,51.562 57.913,51.562 61.693,55.343 61.693,56.167 U3.27
  Top Layer w0.508: IC5.2 IC5.1
NetIC5_3: IC5.3 J11.3 R13.2 | length 14.3
  Top Layer w0.254: IC5.3 44.219,41.712 R13.2 44.219,35.156 45.034,34.341 J11.3
NetIC5_5: IC5.5 J12.3 R14.2 | length 11
  Top Layer w0.254: IC5.5 57.771,39.29 R14.2 57.771,34.53 57.404,34.163 55.804,34.163 J12.3
NetIC5_6: IC5.6 IC5.7 U3.28 | length 14.6
  Top Layer w0.254: IC5.7 62.202,54.295 U3.28
  Top Layer w0.508: IC5.6 IC5.7
NetJ5_2: J5.2 Q1.2 R7.1 | length 15.8
  Top Layer w0.508: Q1.2 137.033,38.719 R7.1 137.144,38.508 139.573,36.079 J5.2
NetJ10_1: J10.1 U3.46 | length 54.3
  Top Layer w0.254: U3.46 69.679,64.726 71.247,66.294 v1(71.247,70.739)
  Bottom Layer w0.254: J10.1 69.215,72.898 v1@71.31,70.802
NetJ10_2: J10.2 U3.49 | length 43.6
  Top Layer w0.254: U3.49 66.252,67.776 66.675,68.199 v1(66.675,69.596)
  Bottom Layer w0.254: J10.2 28.17,70.358 28.878,71.066 65.115,71.066 65.261,70.92 65.351,70.92 v1@66.611,69.659
NetJ10_6: J10.6 U3.55 | length 37.7
  Top Layer w0.254: v1@61.202,65.786 U3.55
  Bottom Layer w0.254: J10.6 51.726,60.198 51.926,59.998 52.722,59.998 52.922,60.198 55.626,60.198 v1(61.214,65.786)
NetJ10_7: J10.7 U3.58 | length 39
  Top Layer w0.254: v1@59.702,62.484 U3.58
  Bottom Layer w0.254: J10.7 54.864,57.658 v1(59.69,62.484)
NetJ10_8: J10.8 U3.59 | length 41.4
  Top Layer w0.254: v1(58.039,58.42) 58.039,62.318 59.202,63.481 U3.59
  Bottom Layer w0.254: J10.8 54.61,55.118 v1@58.039,58.547
NetQ1_1: Q1.1 R9.2 | length 7.8
  Top Layer w0.508: R9.2 139.557,45.482 Q1.1
NetR5_2: R5.2 U3.60 | length 4.4
  Top Layer w0.254: U3.60 58.711,67.785 58.711,68.609 60.332,70.231 R5.2
NetR6_2: R6.2 U3.6 | length 4.3
  Top Layer w0.254: R6.2 50.773,64.024 51.571,63.226 U3.6
NetR10_1: R10.1 U3.1 | length 4.8
  Top Layer w0.254: R10.1 54.007,70.131 54.652,69.486 U3.1
VCC: C3.2 C11.1 J10.4 J10.5 R8.2 R10.2 U1.5 U3.13 U3.19 U3.32 U3.48 U3.64 | length 165.2
  Top Layer w0.254: R8.2 47.765,60.579 48.618,59.726 ; v1(45.593,58.801) 47.693,58.801 48.618,59.726 ; C11.1 56.199,53.848 57.693,55.343 57.693,56.167 U3.19 57.711,56.185 57.711,57.009 58.159,57.458 59.929,57.458 64.193,61.722 ; U3.13 48.618,59.726 ; U3.64 56.702,68.426 56.007,69.121 R10.2 56.007,70.331 56.38,70.704 57.152,70.704 59.292,72.844 66.057,72.844 67.637,71.264 67.637,66.461 66.902,65.726 U3.48 66.243,65.735 64.059,65.735 v1(64.008,65.786) 64.193,65.601 64.193,61.722 ; U3.32 64.193,56.185 64.193,61.722 ; v1(88.265,68.326) 95.897,68.326 C3.2
  Top Layer w0.508: C3.2@96.062,68.211 97.085,67.188 U1.5
  Layer 2 w0.254: v1(45.593,58.801) 41.656,62.738 J10.5 J10.4 30.988,68.326 66.548,68.326 ; v1(64.008,65.786) 66.548,68.326 ; v1(88.265,68.326) 66.548,68.326
pads on no net: IC3.2 IC3.6 IC3.7 IC3.8 U1.4 U3.2 U3.3 U3.4 U3.8 U3.9 U3.10 U3.11 U3.14 U3.15 U3.16 U3.17 U3.20 U3.21 U3.24 U3.25 U3.26 U3.29 U3.33 U3.34 U3.37 U3.38 U3.39 U3.40 U3.43 U3.45 U3.50 U3.51 U3.52 U3.53 U3.54 U3.56 U3.57 U3.61 U3.62

## Polygon pours and split planes (outlines as drawn)
GND on Top Layer "GND_L01_P000" (solid, pour order 0): 26.456,74.471 26.309,31.612 32.247,25.654 118.745,25.654 122.682,29.591 122.682,68.326 111.563,79.445 31.447,79.445
GND on Layer 2 "GND_L03_P002" (solid, pour order 2): 26.506,74.402 26.359,31.542 32.296,25.584 118.794,25.584 122.731,29.521 122.731,68.256 111.613,79.375 31.496,79.375
GND on Bottom Layer "GND_L04_P004" (solid, pour order 4): 26.506,74.402 26.359,31.542 32.296,25.584 118.794,25.584 122.731,29.521 122.731,68.256 111.613,79.375 31.496,79.375
GND on Layer 1 "GND_L02_P005" (solid, pour order 5): 26.506,74.402 26.359,31.542 32.296,25.584 118.794,25.584 122.731,29.521 122.731,68.256 111.613,79.375 31.496,79.375